# EAGLE board pyPhotometry_1.0.2 (EAGLE 6.6.0)
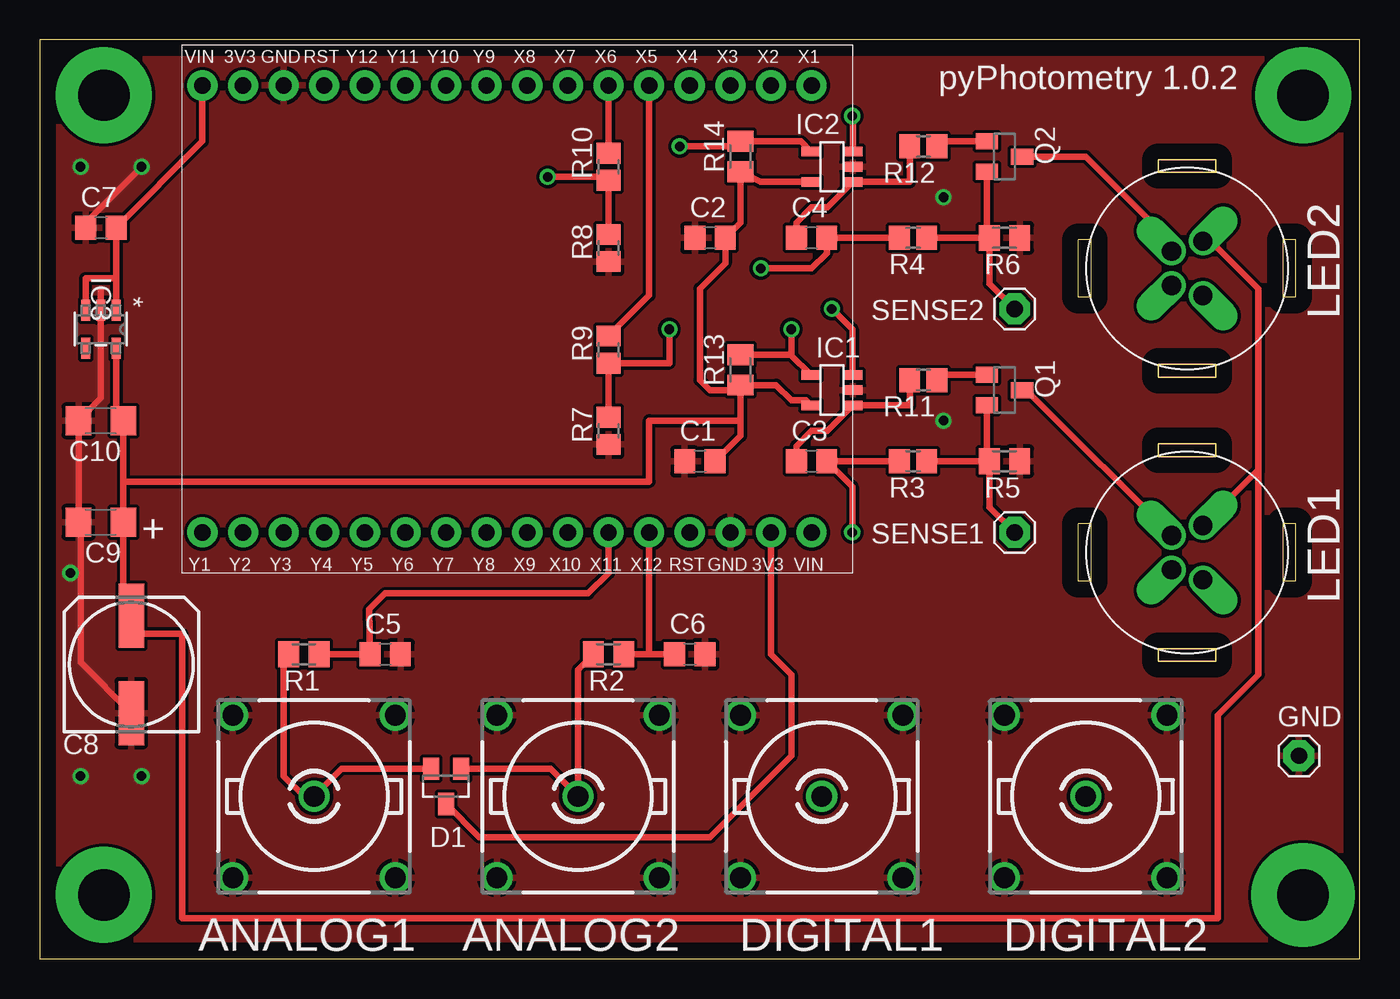
[diagram p0: board, top side]
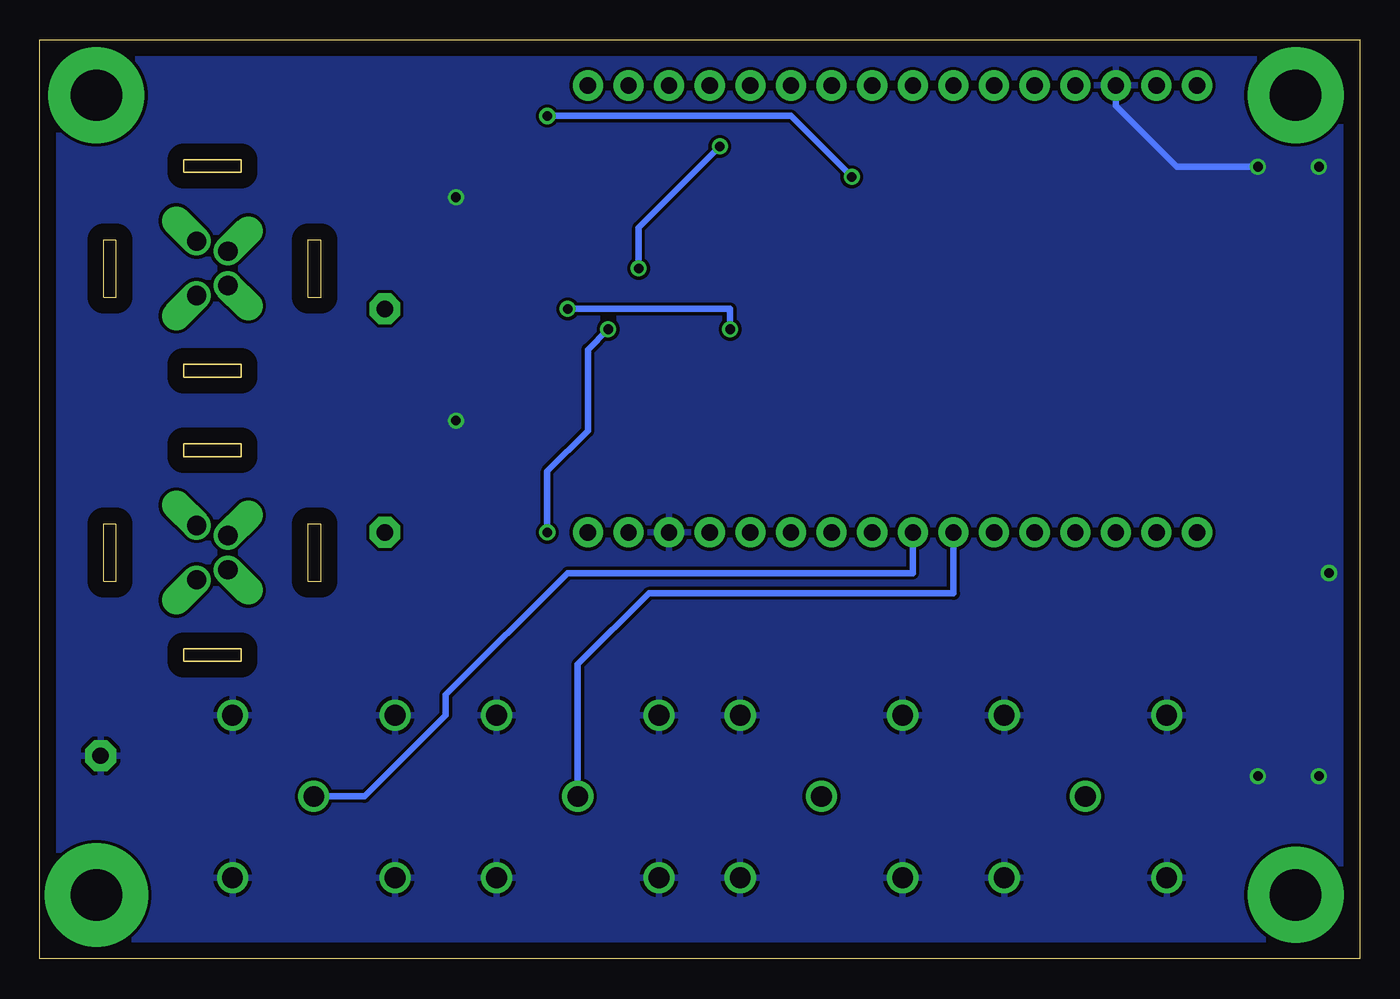
[diagram p1: board, bottom side, seen from below]

Size 82.53 x 57.45 mm. Coordinates in mm from the lower left corner, seen from the top.
Outline: 0,0 82.53,0 82.53,57.45 0,57.45 0,0
Copper layers (1*16): Top 0.035mm / dielectric 1.5mm / Bottom 0.035mm
Design rules "default *": minimum track width 14mil, minimum drill 23mil, track to track 8mil, track to pad 8mil, pad to pad 8mil, via to via 8mil, smd to smd 8mil, copper to edge 40mil, drill to drill 8mil, minimum pad ring 10mil, minimum via ring 8mil, stop-mask expansion 4mil, vias tented up to drill 0mil, thermal gap 10mil

## Footprints (pad centres in the part's own frame; a part is rotated, then mirrored left to right if it is on the bottom)
R141426 = drill 1.295: 1 0,0; 2 5.08,5.08; 3 -5.08,5.08; 4 -5.08,-5.08; 5 5.08,-5.08
C0805 = smd 1.3 x 1.5: 1 -0.95,0; 2 0.95,0
153CLV-0807 = smd 4 x 1.6: + 3.05,0; - -3.05,0
C1206 = smd 1.6 x 1.8: 1 -1.4,0; 2 1.4,0
SOT23 = smd 1 x 1.4: 1 -0.95,-1.1; 2 0.95,-1.1; 3 0,1.1
1X01 = drill 1.016 pad 1.93 octagon: 1 0,0
SOT23-5 = smd 0.6 x 1.2: 1 -0.95,-1.306; 2 0,-1.306; 3 0.95,-1.306; 4 0.95,1.306; 5 -0.95,1.306
SOT-23-5_M5 = smd 1.321 x 0.559: 1 -1.194,0.95; 2 -1.194,0; 3 -1.194,-0.95; 4 1.194,-0.95; 5 1.194,0.95
M8-4 = drill 1.2 pad 1.6 offset: 1 1.7,-0.975; 2 1.075,0.975; 3 -1.075,0.975; 4 -1.7,-0.975
M0805 = smd 1.3 x 1.6: 1 -0.95,0; 2 0.95,0
R0805 = smd 1.3 x 1.5: 1 -0.85,0; 2 0.85,0
PYBOARD-REDUCED-3 = drill 1.016 pad 1.88: 3V3_1 2.54,5.08; 3V3_2 30.48,38.1; GND_1 2.54,7.62; GND_6 30.48,35.56; RESET_1 2.54,10.16; RESET_2 30.48,33.02; VIN 2.54,2.54; VIN_5 30.48,40.64; X1 30.48,2.54; X2 30.48,5.08; X3 30.48,7.62; X4 30.48,10.16; X5 30.48,12.7; X6 30.48,15.24; X7 30.48,17.78; X8 30.48,20.32; X9 2.54,20.32; X10 2.54,17.78; X11 2.54,15.24; X12 2.54,12.7; Y1 2.54,40.64; Y2 2.54,38.1; Y3 2.54,35.56; Y4 2.54,33.02; Y5 2.54,30.48; Y6 2.54,27.94; Y7 2.54,25.4; Y8 2.54,22.86; Y9 30.48,22.86; Y10 30.48,25.4; Y11 30.48,27.94; Y12 30.48,30.48

## Placement (x,y rotation side)
ANALOG1  R141426  [R141426]  17.14,10.16 180 top
ANALOG2  R141426  [R141426]  33.66,10.16 180 top
C1  100nF  [C0805]  41.27,31.11 0 top
C2  100nF  [C0805]  41.91,45.09 0 top
C3  100pF  [C0805]  48.26,31.11 0 top
C4  100pF  [C0805]  48.26,45.09 0 top
C5  15nF  [C0805]  21.59,19.05 0 top
C6  15nF  [C0805]  40.64,19.05 0 top
C7  1uF  [C0805]  3.81,45.72 0 top
C8  1000uF  [153CLV-0807]  5.71,18.41 90 top
C9  100uF  [C1206]  3.81,27.3 180 top
C10  10uF  [C1206]  3.81,33.66 180 top
D1  BAT54C  [SOT23]  25.4,10.79 180 top
DIGITAL1  R141426  [R141426]  48.9,10.16 180 top
DIGITAL2  R141426  [R141426]  65.41,10.16 180 top
GND  [1X01]  78.74,12.7 0 top
IC1  OPA197  [SOT23-5]  49.53,35.56 90 top
IC2  OPA197  [SOT23-5]  49.53,49.53 90 top
IC3  MIC2004-0.5YM5  [SOT-23-5_M5]  3.81,39.37 270 top
LED1  M8-4  [M8-4]  71.75,25.4 90 top
LED2  M8-4  [M8-4]  71.75,43.18 90 top
Q1  [SOT23]  60.33,35.56 270 top
Q2  [SOT23]  60.33,50.16 270 top
R1  1K  [M0805]  16.51,19.05 180 top
R2  1K  [M0805]  35.56,19.05 180 top
R3  1k  [R0805]  54.61,31.11 180 top
R4  1k  [R0805]  54.61,45.09 180 top
R5  4R7  [M0805]  60.33,31.11 180 top
R6  4R7  [M0805]  60.33,45.09 180 top
R7  20K  [R0805]  35.56,33.02 90 top
R8  20K  [R0805]  35.56,44.45 90 top
R9  100K  [R0805]  35.56,38.1 90 top
R10  100K  [R0805]  35.56,49.53 90 top
R11  100R  [R0805]  55.24,36.2 180 top
R12  100R  [R0805]  55.24,50.8 180 top
R13  4M7  [M0805]  43.81,36.83 90 top
R14  4M7  [M0805]  43.81,50.16 90 top
SENSE1  [1X01]  60.96,26.67 0 top
SENSE2  [1X01]  60.96,40.64 0 top
U$1  PYBOARD-REDUCED-3  [PYBOARD-REDUCED-3]  50.8,24.13 90 top

## Library data of the parts
ANALOG1 ANALOG2 DIGITAL1 DIGITAL2 = con-coax; MF: FARNELL; MPN: R141426161; OC_FARNELL: 4195115; OC_NEWARK: 14J7919
C1-C10 = rcl
D1 = diode
GND Q1 Q2 SENSE1 SENSE2 = adafruit
IC1 IC2 = burr-brown
IC3 = MIC2004; MANUFACTURER_PART_NUMBER: MIC20040.5YM5; VENDOR: Micrel
LED1 LED2 = pinhead
R1-R14 = resistor
U$1 = micropython

## Nets
+3V3: D1.3 U$1.3V3_1
+5V: C7.2 IC3.1 IC3.3 U$1.VIN_5
CLAMP1: ANALOG1.1 D1.2 R1.2
CLAMP2: ANALOG2.1 D1.1 R2.2
CTRL1: R9.2 U$1.X5
CTRL2: R10.2 U$1.X6
DIGITAL1: DIGITAL1.1 U$1.Y7
DIGITAL2: DIGITAL2.1 U$1.Y8
GND: ANALOG1.2 ANALOG1.3 ANALOG1.4 ANALOG1.5 ANALOG2.2 ANALOG2.3 ANALOG2.4 ANALOG2.5 C1.1 C2.1 C5.2 C6.2 C7.1 C8.- C9.2 C10.2 DIGITAL1.2 DIGITAL1.3 DIGITAL1.4 DIGITAL1.5 DIGITAL2.2 DIGITAL2.3 DIGITAL2.4 DIGITAL2.5 GND.1 IC1.2 IC2.2 IC3.2 R5.1 R6.1 R7.1 R8.1 U$1.GND_1 U$1.GND_6
N$1: C3.1 IC1.1 R11.2
N$2: C3.2 IC1.4 R3.2 R13.2
N$3: IC1.3 R7.2 R9.1
N$7: Q1.1 R11.1
N$8: LED1.2 Q1.3
N$9: Q1.2 R3.1 R5.2 SENSE1.1
N$11: C4.1 IC2.1 R12.2
N$12: Q2.2 R4.1 R6.2 SENSE2.1
N$13: C4.2 IC2.4 R4.2 R14.2
N$14: IC2.3 R8.2 R10.1
N$15: Q2.1 R12.1
N$16: LED2.2 Q2.3
SIGNAL1: C5.1 R1.1 U$1.X11
SIGNAL2: C6.1 R2.1 U$1.X12
V+: C1.2 C2.2 C8.+ C9.1 C10.1 IC1.5 IC2.5 IC3.5 LED1.1 LED2.1 R13.1 R14.1

## Tracks (layer width: path | path; a pad name or v marks a point on that pad's centre or on a via)
+3V3
  Top 0.406: U$1.3V3_1 45.72,19.05 46.99,17.78 46.99,12.7 41.91,7.62 27.48,7.62 D1.3
+5V
  Top 0.406: U$1.VIN_5 10.16,51.12 C7.2 4.76,42.55 | 4.76,42.55 IC3.1 | IC3.3 2.86,42.55 4.76,42.55
CLAMP1
  Top 0.406: R1.2 15.24,18.73 15.24,11.43 16.51,10.16 ANALOG1.1 18.88,11.89 D1.2
CLAMP2
  Top 0.406: D1.1 31.92,11.89 ANALOG2.1 33.66,18.09 R2.2
CTRL1
  Top 0.406: U$1.X5 38.1,41.49 R9.2
CTRL2
  Top 0.406: U$1.X6 R10.2
DIGITAL1
  Bottom 0.406: DIGITAL1.1 48.9,18.41 44.45,22.86 25.4,22.86 U$1.Y7
DIGITAL2
  Bottom 0.406: DIGITAL2.1 62.23,10.16 57.15,15.24 57.15,16.51 49.53,24.13 27.94,24.13 U$1.Y8
GND  (via drill 0.6)
  Top 0.406: v6.35,49.53 2.54,45.72 C7.1 | 3.81,41.91 IC3.2 3.81,35.05 C10.2 C9.2 2.54,27.3 2.54,18.54 C8.-
  Bottom 0.406: U$1.GND_6 15.24,53.34 11.43,49.53 v6.35,49.53
  other vias: 2.54,49.53 2.54,11.43 6.35,11.43 1.91,24.13 56.52,47.62 56.52,33.66
  pour Bottom: 0,0 0,57.78 82.55,57.78 83.19,0
  pour Top: 0,0 0,57.78 82.55,57.78 83.19,0
N$1
  Top 0.406: C3.1 47.31,32.07 48.26,33.02 49.25,33.02 IC1.1 54.4,34.61 R11.2
N$2  (via drill 0.6)
  Top 0.406: R13.2 46.95,37.78 | 46.95,37.78 IC1.4 | R3.2 C3.2 50.8,29.52 v50.8,26.67 | v46.99,39.37 46.99,37.82 46.95,37.78
  Bottom 0.406: v50.8,26.67 50.8,30.48 48.26,33.02 48.26,38.1 v46.99,39.37
N$3  (via drill 0.6)
  Top 0.406: R7.2 R9.1 39.37,37.25 v39.37,39.37 | v49.53,40.64 50.8,39.37 50.8,36.55 IC1.3
  Bottom 0.406: v49.53,40.64 39.37,40.64 v39.37,39.37
N$4  (via drill 3.2 pad 6)
  other vias: 4,54
N$5  (via drill 3.2 pad 6)
  other vias: 4,4
N$6  (via drill 3.2 pad 6.45)
  other vias: 79,4
N$7
  Top 0.406: Q1.1 56.41,36.51 R11.1
N$8
  Top 0.406: Q1.3 62.06,35.2 LED1.2
N$9
  Top 0.406: R3.1 R5.2 | Q1.2 59.23,31.27 R5.2 | R5.2 59.38,28.25 SENSE1.1
N$10  (via drill 3.2 pad 6)
  other vias: 79,54
N$11
  Top 0.406: C4.1 47.31,46.04 48.26,46.99 49.25,46.99 IC2.1 54.4,48.58 R12.2
N$12
  Top 0.406: R6.2 R4.1 | R6.2 59.38,42.23 SENSE2.1 | Q2.2 59.23,45.23 R6.2
N$13  (via drill 0.6)
  Top 0.406: R4.2 C4.2 49.21,44.13 48.26,43.18 v45.09,43.18 | IC2.4 47.59,51.12 R14.2 43.5,50.8 v40.01,50.8
  Bottom 0.406: v45.09,43.18 45.09,45.72 v40.01,50.8
N$14  (via drill 0.6)
  Top 0.406: R8.2 R10.1 35.34,48.9 v31.75,48.9 | IC2.3 50.84,52.67 v50.8,52.7
  Bottom 0.406: v50.8,52.7 35.56,52.7 v31.75,48.9
N$15
  Top 0.406: Q2.1 56.09,51.12 R12.1
N$16
  Top 0.406: LED2.2 70.78,44.79 65.41,50.16 Q2.3
SIGNAL1
  Top 0.406: R1.1 C5.1 20.59,21.86 21.59,22.86 34.29,22.86 35.56,24.13 U$1.X11
SIGNAL2
  Top 0.406: R2.1 38.1,19.05 | 38.1,19.05 C6.1 | U$1.X12 38.1,19.05
V+
  Top 0.406: R13.1 43.81,33.66 | 43.81,33.66 43.81,32.7 C1.2 | IC3.5 4.76,34.1 C10.1 5.21,29.84 | 5.21,29.84 C9.1 5.21,21.97 C8.+ 5.71,20.95 6.35,20.32 8.89,20.32 8.89,2.54 73.66,2.54 73.66,15.24 76.2,17.78 76.2,30.48 | IC2.5 45.05,48.58 R14.1 43.81,46.04 C2.2 42.86,43.49 41.27,41.91 41.27,36.2 41.91,35.56 43.49,35.56 R13.1 | R13.1 46.03,35.88 46.99,34.92 47.91,34.92 IC1.5 | 5.21,29.84 38.1,29.84 38.1,33.66 43.81,33.66 | LED2.1 73.23,44.88 76.2,41.91 76.2,30.48 | 76.2,30.48 76.11,30.48 LED1.1

## Text on the board
tPlace: +
tNames: pyPhotometry 1.0.2
tDocu: Licensed under the TAPR Open Hardware License / (www.tapr.org/OHL) / Copyright 2018 Thomas Akam